# Altium PCB ESP-WROOM32.PcbDoc (part 2 of 2)
Units mil, origin at the board's own origin, x right, y up, seen from the top; angles counter-clockwise.
Board outline 3370 x 1400 mil, 2 copper layers (L1, L2); 42 components, 54 nets, 176 pads, 101 vias.
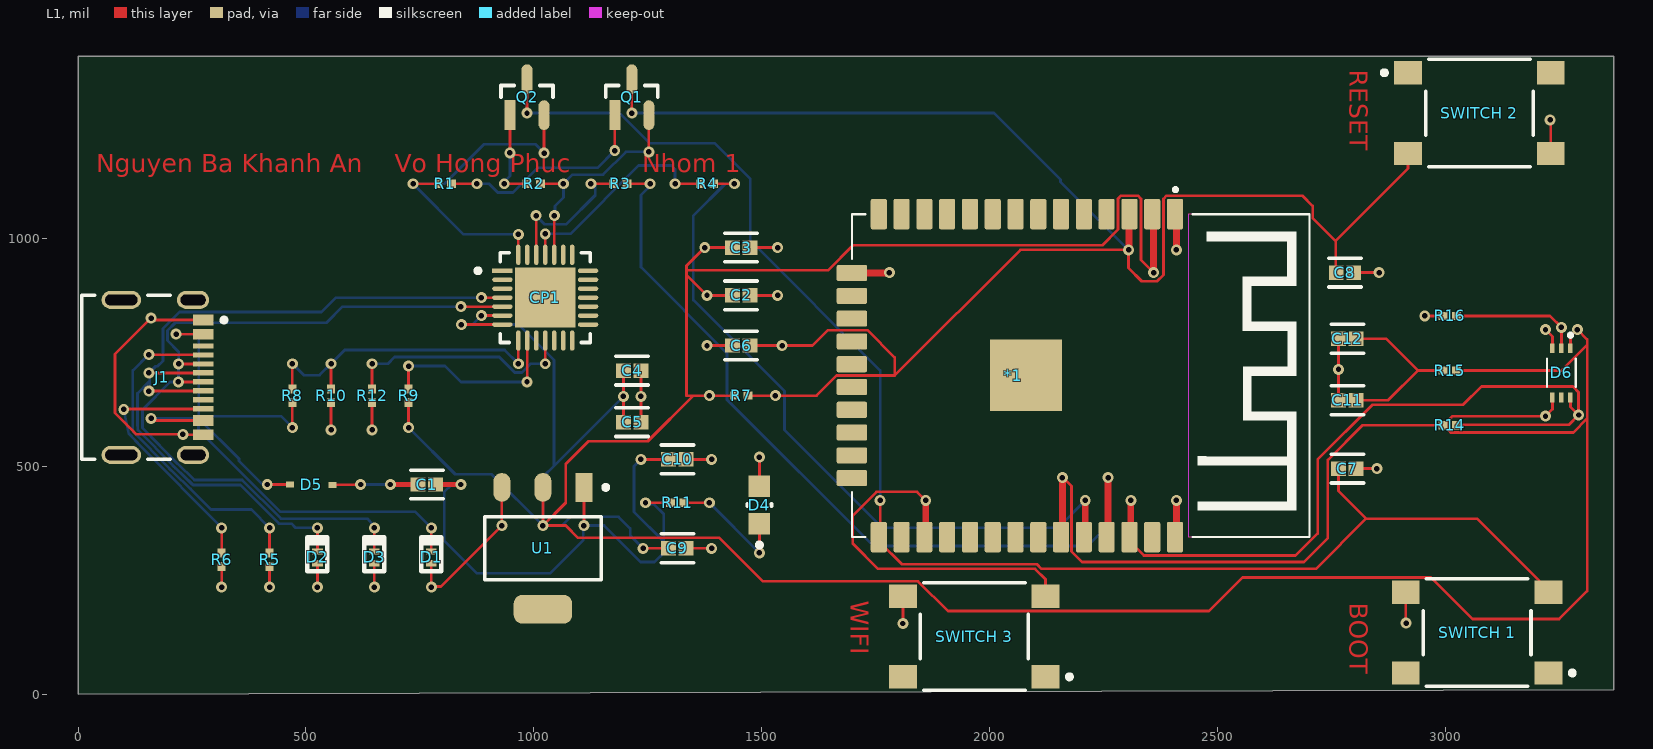
[diagram p0: L1 view]

## Part data (continued)
R10: library part RC0402FR-1347K5L, "RES 47.5K OHM 1% 1/16W 0402", Case/Package=0402, LCSC part number=C106235, Manufacturer="Yageo Group", Max Operating Temperature=155°C, Min Operating Temperature=-55°C, Power Dissipation=62.5mW, Supplier Part Number=13-RC0402FR-1347K5LCT-ND, Temperature Coefficient=100ppm/°C, Tolerance=1%, Working Voltage=50V, Category="Chip SMD Resistors", China RoHS=Non-Compliant, ComponentLink1Description=https://datasheet.octopart.com:443/RC0402FR-1347K5L-Yageo-datasheet-175887523.pdf?src-supplier=IHS, ComponentLink1URL=https://datasheet.octopart.com:443/RC0402FR-1347K5L-Yageo-datasheet-175887523.pdf?src-supplier=IHS, ComponentLink2Description=https://datasheet.octopart.com:443/RC0402FR-1347K5L-Yageo-Group-datasheet-189192902.pdf?src-supplier=TME, ComponentLink2URL=https://datasheet.octopart.com:443/RC0402FR-1347K5L-Yageo-Group-datasheet-189192902.pdf?src-supplier=TME, ComponentLink3Description=https://datasheet.octopart.com:443/RC0402FR-1347K5L-Yageo-Group-datasheet-176638170.pdf?src-supplier=TME, ComponentLink3URL=https://datasheet.octopart.com:443/RC0402FR-1347K5L-Yageo-Group-datasheet-176638170.pdf?src-supplier=TME, ComponentLink4Description=https://datasheet.octopart.com/RC0402FR-1347K5L-Yageo-datasheet-73766026.pdf, ComponentLink4URL=https://datasheet.octopart.com/RC0402FR-1347K5L-Yageo-datasheet-73766026.pdf, ComponentLink5Description=https://datasheet.octopart.com:443/RC0402FR-1347K5L-Yageo-datasheet-10408619.pdf?src-supplier=_legacy+Avnet, ComponentLink5URL=https://datasheet.octopart.com:443/RC0402FR-1347K5L-Yageo-datasheet-10408619.pdf?src-supplier=_legacy+Avnet, ComponentLink6Description=http://sigma.octopart.com:80/conflict_mineral_statement/Yageo-company-3.pdf?src-supplier=Compliance+Statements, ComponentLink6URL=http://sigma.octopart.com:80/conflict_mineral_statement/Yageo-company-3.pdf?src-supplier=Compliance+Statements, ComponentLink7Description=http://sigma.octopart.com:80/rohs_statement/Yageo-company-2.pdf?src-supplier=Compliance+Statements, ComponentLink7URL=http://sigma.octopart.com:80/rohs_statement/Yageo-company-2.pdf?src-supplier=Compliance+Statements, Composition="Thick Film", Contact Plating=Tin, Depth=500µm, Height=350µm, Length=1mm, Lifecycle Status=Production, Manufacturer Part Number=RC0402FR-1347K5L, Military Standard=Not, Mounting Technology="Surface Mount", Number of Terminals=2, Pricing="1=0.1, 10=0.02, 25=0.014, 50=0.0112, 100=0.009, 250=0.00688, 500=0.00566, 1000=0.00474, 5000=0.00328 (USD)", REACH SVHC=Yes, RoHS=Compliant, Stock=75939, Supplier=DigiKey, Width=500µm
R14: library part RC0402JR-0747KL, "RES 4.7K OHM 5% 1/16W 0402", Case Code (Imperial)=0402, LCSC part number=C105870, Manufacturer="Yageo Group", Max Operating Temperature=155°C, Max Power Dissipation=63mW, Min Operating Temperature=-55°C, Power Dissipation=62.5mW, Supplier Part Number=311-47KJRCT-ND, Temperature Coefficient=100ppm/°C, Tolerance=5%, Voltage Rating=50V, Case/Package=0402, Category="Chip SMD Resistors", China RoHS=Non-Compliant, ComponentLink1Description=https://datasheet.octopart.com:443/RC0402JR-0747KL-Yageo-datasheet-175887523.pdf?src-supplier=IHS, ComponentLink1URL=https://datasheet.octopart.com:443/RC0402JR-0747KL-Yageo-datasheet-175887523.pdf?src-supplier=IHS, ComponentLink2Description=https://datasheet.octopart.com:443/RC0402JR-0747KL-Yageo-datasheet-10408619.pdf?src-supplier=Newark, ComponentLink2URL=https://datasheet.octopart.com:443/RC0402JR-0747KL-Yageo-datasheet-10408619.pdf?src-supplier=Newark, ComponentLink3Description=https://datasheet.octopart.com:443/RC0402JR-0747KL-Yageo-datasheet-8324527.pdf?src-supplier=Newark, ComponentLink3URL=https://datasheet.octopart.com:443/RC0402JR-0747KL-Yageo-datasheet-8324527.pdf?src-supplier=Newark, ComponentLink4Description=https://datasheet.octopart.com:443/RC0402JR-0747KL-Yageo-datasheet-98239111.pdf?src-supplier=Upverter, ComponentLink4URL=https://datasheet.octopart.com:443/RC0402JR-0747KL-Yageo-datasheet-98239111.pdf?src-supplier=Upverter, ComponentLink5Description=https://datasheet.octopart.com:443/RC0402JR-0747KL-Yageo-datasheet-62067350.pdf?src-supplier=element14+APAC, ComponentLink5URL=https://datasheet.octopart.com:443/RC0402JR-0747KL-Yageo-datasheet-62067350.pdf?src-supplier=element14+APAC, ComponentLink6Description=https://datasheet.octopart.com:443/RC0402JR-0747KL-Yageo-datasheet-176638170.pdf?src-supplier=JRH+Electronics, ComponentLink6URL=https://datasheet.octopart.com:443/RC0402JR-0747KL-Yageo-datasheet-176638170.pdf?src-supplier=JRH+Electronics, ComponentLink7Description=https://datasheet.octopart.com:443/RC0402JR-0747KL-Yageo-datasheet-164759695.pdf?src-supplier=Future+Electronics, ComponentLink7URL=https://datasheet.octopart.com:443/RC0402JR-0747KL-Yageo-datasheet-164759695.pdf?src-supplier=Future+Electronics, ComponentLink8Description=https://datasheet.octopart.com:443/RC0402JR-0747KL-Yageo-datasheet-137700087.pdf?src-supplier=Future+Electronics, ComponentLink8URL=https://datasheet.octopart.com:443/RC0402JR-0747KL-Yageo-datasheet-137700087.pdf?src-supplier=Future+Electronics, ComponentLink9Description=https://datasheet.octopart.com:443/RC0402JR-0747KL-Yageo-datasheet-12531192.pdf?src-supplier=Future+Electronics, ComponentLink9URL=https://datasheet.octopart.com:443/RC0402JR-0747KL-Yageo-datasheet-12531192.pdf?src-supplier=Future+Electronics, ComponentLink10Description=https://datasheet.octopart.com:443/RC0402JR-0747KL-Yageo-datasheet-8324255.pdf?src-supplier=Future+Electronics, ComponentLink10URL=https://datasheet.octopart.com:443/RC0402JR-0747KL-Yageo-datasheet-8324255.pdf?src-supplier=Future+Electronics, ComponentLink11Description=https://datasheet.octopart.com:443/RC0402JR-0747KL-Yageo-datasheet-148775077.pdf?src-supplier=TME, ComponentLink11URL=https://datasheet.octopart.com:443/RC0402JR-0747KL-Yageo-datasheet-148775077.pdf?src-supplier=TME, ComponentLink12Description=https://datasheet.octopart.com/RC0402JR-0747KL-Yageo-datasheet-73766026.pdf, ComponentLink12URL=https://datasheet.octopart.com/RC0402JR-0747KL-Yageo-datasheet-73766026.pdf, ComponentLink13Description=https://datasheet.octopart.com:443/RC0402JR-0747KL-Yageo-datasheet-8329306.pdf?src-supplier=element14, ComponentLink13URL=https://datasheet.octopart.com:443/RC0402JR-0747KL-Yageo-datasheet-8329306.pdf?src-supplier=element14, ComponentLink14Description=http://sigma.octopart.com:80/rohs_statement/Yageo-company-2.pdf?src-supplier=Compliance+Statements, ComponentLink14URL=http://sigma.octopart.com:80/rohs_statement/Yageo-company-2.pdf?src-supplier=Compliance+Statements, ComponentLink15Description=http://sigma.octopart.com:80/conflict_mineral_statement/Yageo-company-3.pdf?src-supplier=Compliance+Statements, ComponentLink15URL=http://sigma.octopart.com:80/conflict_mineral_statement/Yageo-company-3.pdf?src-supplier=Compliance+Statements, Composition="Thick Film", Depth=500µm, Features="Moisture Resistant", Height=350µm, Lead Free="Lead Free", Length=1mm, Lifecycle Status=Production, Manufacturer Part Number=RC0402JR-0747KL, Military Standard=Not, Mounting Technology="Surface Mount", Number of Terminals=2, Number of Terminations=2, Packaging="Tape & Reel", Pins=2, Power Rating=63mW, Pricing="1=0.1, 10=0.006, 25=0.0044, 50=0.003, 100=0.0028 (USD)", REACH SVHC=Yes, RoHS=Compliant, Schedule B="8533210045, 8533210045|8533210045, 8533210045|8533210045|8533210045, 8533210045|8533210045|8533210045|8533210045", Stock=272791, Supplier=DigiKey, Termination=SMD/SMT, Voltage Rating (AC)=50V, Voltage Rating (DC)=50V, Width=500µm, Working Voltage=50V
R15 R16: library part RC0402JR-071KL, "RES 1K OHM 5% 1/16W 0402", Case Code (Imperial)=0402, LCSC part number=C105637, Manufacturer="Yageo Group", Max Operating Temperature=155°C, Max Power Dissipation=63mW, Min Operating Temperature=-55°C, Power Dissipation=62.5mW, Supplier Part Number=311-1.0KJRCT-ND, Temperature Coefficient=100ppm/°C, Tolerance=5%, Voltage Rating=50V, Case/Package=0402, Category="Chip SMD Resistors", China RoHS=Non-Compliant, ComponentLink1Description=https://datasheet.octopart.com:443/RC0402JR-071KL-Yageo-datasheet-175887523.pdf?src-supplier=Farnell, ComponentLink1URL=https://datasheet.octopart.com:443/RC0402JR-071KL-Yageo-datasheet-175887523.pdf?src-supplier=Farnell, ComponentLink2Description=https://datasheet.octopart.com:443/RC0402JR-071KL-Yageo-datasheet-8324527.pdf?src-supplier=Farnell, ComponentLink2URL=https://datasheet.octopart.com:443/RC0402JR-071KL-Yageo-datasheet-8324527.pdf?src-supplier=Farnell, ComponentLink3Description=https://datasheet.octopart.com:443/RC0402JR-071KL-Yageo-datasheet-10408619.pdf?src-supplier=Newark, ComponentLink3URL=https://datasheet.octopart.com:443/RC0402JR-071KL-Yageo-datasheet-10408619.pdf?src-supplier=Newark, ComponentLink4Description=https://datasheet.octopart.com:443/RC0402JR-071KL-Yageo-datasheet-505231.pdf?src-supplier=Newark, ComponentLink4URL=https://datasheet.octopart.com:443/RC0402JR-071KL-Yageo-datasheet-505231.pdf?src-supplier=Newark, ComponentLink5Description=https://datasheet.octopart.com:443/RC0402JR-071KL-Yageo-datasheet-79472498.pdf?src-supplier=Upverter, ComponentLink5URL=https://datasheet.octopart.com:443/RC0402JR-071KL-Yageo-datasheet-79472498.pdf?src-supplier=Upverter, ComponentLink6Description=https://datasheet.octopart.com:443/RC0402JR-071KL-Yageo-datasheet-44585784.pdf?src-supplier=Upverter, ComponentLink6URL=https://datasheet.octopart.com:443/RC0402JR-071KL-Yageo-datasheet-44585784.pdf?src-supplier=Upverter, ComponentLink7Description=https://datasheet.octopart.com:443/RC0402JR-071KL-Yageo-datasheet-62067350.pdf?src-supplier=element14+APAC, ComponentLink7URL=https://datasheet.octopart.com:443/RC0402JR-071KL-Yageo-datasheet-62067350.pdf?src-supplier=element14+APAC, ComponentLink8Description=https://datasheet.octopart.com:443/RC0402JR-071KL-Yageo-datasheet-148775077.pdf?src-supplier=JRH+Electronics, ComponentLink8URL=https://datasheet.octopart.com:443/RC0402JR-071KL-Yageo-datasheet-148775077.pdf?src-supplier=JRH+Electronics, ComponentLink9Description=https://datasheet.octopart.com:443/RC0402JR-071KL-Yageo-datasheet-12531192.pdf?src-supplier=Seeed+Studio, ComponentLink9URL=https://datasheet.octopart.com:443/RC0402JR-071KL-Yageo-datasheet-12531192.pdf?src-supplier=Seeed+Studio, ComponentLink10Description=https://datasheet.octopart.com:443/RC0402JR-071KL-Yageo-datasheet-164759695.pdf?src-supplier=Future+Electronics, ComponentLink10URL=https://datasheet.octopart.com:443/RC0402JR-071KL-Yageo-datasheet-164759695.pdf?src-supplier=Future+Electronics, ComponentLink11Description=https://datasheet.octopart.com:443/RC0402JR-071KL-Yageo-datasheet-137700087.pdf?src-supplier=Future+Electronics, ComponentLink11URL=https://datasheet.octopart.com:443/RC0402JR-071KL-Yageo-datasheet-137700087.pdf?src-supplier=Future+Electronics, ComponentLink12Description=https://datasheet.octopart.com/RC0402JR-071KL-Yageo-datasheet-73766026.pdf, ComponentLink12URL=https://datasheet.octopart.com/RC0402JR-071KL-Yageo-datasheet-73766026.pdf, ComponentLink13Description=https://datasheet.octopart.com:443/RC0402JR-071KL-Yageo-datasheet-8329306.pdf?src-supplier=element14, ComponentLink13URL=https://datasheet.octopart.com:443/RC0402JR-071KL-Yageo-datasheet-8329306.pdf?src-supplier=element14, ComponentLink14Description=http://sigma.octopart.com:80/rohs_statement/Yageo-company-2.pdf?src-supplier=Compliance+Statements, ComponentLink14URL=http://sigma.octopart.com:80/rohs_statement/Yageo-company-2.pdf?src-supplier=Compliance+Statements, ComponentLink15Description=http://sigma.octopart.com:80/conflict_mineral_statement/Yageo-company-3.pdf?src-supplier=Compliance+Statements, ComponentLink15URL=http://sigma.octopart.com:80/conflict_mineral_statement/Yageo-company-3.pdf?src-supplier=Compliance+Statements, Composition="Thick Film", Depth=500µm, Features="Moisture Resistant", Height=350µm, Lead Free="Lead Free", Length=1mm, Lifecycle Status=Production, Manufacturer Part Number=RC0402JR-071KL, Military Standard=Not, Mounting Technology="Surface Mount", Number of Terminals=2, Number of Terminations=2, Packaging="Tape & Reel", Pins=2, Power Rating=62.5mW, Pricing="1=0.1, 10=0.006, 25=0.0052, 50=0.004, 100=0.0036, 250=0.00284 (USD)", REACH SVHC=Yes, RoHS=Compliant, Schedule B="8533210045, 8533210045|8533210045, 8533210045|8533210045|8533210045, 8533210045|8533210045|8533210045|8533210045", Stock=6491283, Supplier=DigiKey, Termination=SMD/SMT, Voltage Rating (AC)=50V, Voltage Rating (DC)=50V, Width=500µm, Working Voltage=50V
"SWITCH 1" "SWITCH 2" "SWITCH 3": "SWITCH TACTILE SPST-NO 0.05A 12V", Color=Black, Contact Current Rating=50mA, Contact Resistance=100mΩ, Insulation Resistance=100GΩ, LCSC part number=C221877, Manufacturer="C&K Components", Max Operating Temperature=60°C, Max Voltage Rating (DC)=12V, Min Operating Temperature=-20°C, Operating Force=1.27N, Supplier Part Number=CKN9088CT-ND, Actuator Material="Nylon, Polyamide", Category="Tactile Switches", ComponentLink1Description=https://datasheet.octopart.com:443/PTS645SL50SMTR92LFS-C%26K-Components-datasheet-169841344.pdf?src-supplier=Newark, ComponentLink1URL=https://datasheet.octopart.com:443/PTS645SL50SMTR92LFS-C%26K-Components-datasheet-169841344.pdf?src-supplier=Newark, ComponentLink2Description=https://datasheet.octopart.com:443/PTS645SL50SMTR92LFS-C%26K-Components-datasheet-27907579.pdf?src-supplier=Newark, ComponentLink2URL=https://datasheet.octopart.com:443/PTS645SL50SMTR92LFS-C%26K-Components-datasheet-27907579.pdf?src-supplier=Newark, ComponentLink3Description=https://datasheet.octopart.com:443/PTS645SL50SMTR92LFS-C%26K-Components-datasheet-67873720.pdf?src-supplier=Master+Electronics, ComponentLink3URL=https://datasheet.octopart.com:443/PTS645SL50SMTR92LFS-C%26K-Components-datasheet-67873720.pdf?src-supplier=Master+Electronics, ComponentLink4Description=https://datasheet.octopart.com:443/PTS645SL50SMTR92LFS-C%26K-Components-datasheet-165782998.pdf?src-supplier=Farnell, ComponentLink4URL=https://datasheet.octopart.com:443/PTS645SL50SMTR92LFS-C%26K-Components-datasheet-165782998.pdf?src-supplier=Farnell, ComponentLink5Description=https://datasheet.octopart.com:443/PTS645SL50SMTR-92-LFS-C%26K-Components-datasheet-150821959.pdf?src-supplier=TME, ComponentLink5URL=https://datasheet.octopart.com:443/PTS645SL50SMTR-92-LFS-C%26K-Components-datasheet-150821959.pdf?src-supplier=TME, ComponentLink6Description=https://datasheet.octopart.com:443/PTS645SL50SMTR92LFS-C%26K-Components-datasheet-138128951.pdf?src-supplier=Future+Electronics, ComponentLink6URL=https://datasheet.octopart.com:443/PTS645SL50SMTR92LFS-C%26K-Components-datasheet-138128951.pdf?src-supplier=Future+Electronics, ComponentLink7Description=http://sigma.octopart.com:80/reach_statement/ITT-company-18.pdf?src-supplier=Compliance+Statements, ComponentLink7URL=http://sigma.octopart.com:80/reach_statement/ITT-company-18.pdf?src-supplier=Compliance+Statements, Contact Material=Bronze, Contact Plating=Silver, Current Rating=50mA, Depth=9mm, Electrical Life=100kcycles, Height=3.45mm, Illumination Type=Non-Illuminated, Lead Free="Lead Free", Length=6mm, Lifecycle Status=Production, Manufacturer Part Number=PTS645SL50SMTR92LFS, Max Current Rating=50mA, Mechanical Life=100kcycles, Mounting Technology="Surface Mount", Number of Positions=1, Orientation=Straight, Packaging="Tape and Reel", Pricing="1=0.35, 10=0.3, 25=0.2804, 100=0.251, 250=0.23256, 500=0.21948 (USD)", REACH SVHC=Yes, RoHS=Compliant, Stock=13861, Supplier=DigiKey, Switch Function=Off-Mom, Termination="Gull Wing", Throw Configuration=SPST, Voltage Rating (DC)=12V
U1: "IC REG LINEAR 3.3V 1A SOT-223", LCSC part number=C6186, Manufacturer="UMW(Youtai Semiconductor Co., Ltd.)", Supplier Part Number=4518-AMS1117-3.3CT-ND, Category="LDO Voltage Regulators", Manufacturer Part Number=AMS1117-3.3, Pricing="1=0.68, 10=0.407, 25=0.3352, 100=0.2538, 250=0.2138, 500=0.18916, 1000=0.16853 (USD)", Stock=9165, Supplier=DigiKey

## Via types
v1: diameter 24, hole 12, L1 to L2, 101 vias

## Nets (pads, with @x,y where several pads share a name; then routed paths per layer and width w, separated by ;. In a path a pad name is that pad's centre, name@x,y a point inside that pad or via, vN(x,y) a via of type N, cw(c..) or ccw(c..) an arc to the next point about the centre after c; other vN are vias at no path point)
CLK: *1.20
CMD: *1.19
EN: "SWITCH 2.3" *1.3 C6.2 C8.2 Q1.3 R7.1 | length 3801.7
  L1 w6: v1(1215,1275) Q1.3 ; R7.1 v1(1530,655) 1620.15,655 1664.43,699.28 1791.78,699.28 ; C6.2 v1(1545,765) 1611.59,765 1645.31,798.72 1732.03,798.72 1791.78,738.96 1791.78,699.28 ; C8.2 2759.52,926.22 2759.52,994.52 ; 2918.5,1186.42 2918.5,1153.5 2759.52,994.52 ; 1791.78,699.28 2067.5,975 v1(2305,975) 2305,935 2334,906 2367.87,906 2381.72,919.85 2381.72,1086.84 2388.67,1093.8 2686.2,1093.8 2709.08,1070.92 2709.08,1044.97 2759.52,994.52
  L1 w15: v1(2305,975) 2306,976 2306,1053.33 *1.3@2305,1054.33
  L2 w6: v1(1215,1275) 2010,1275 2155.78,1129.22 2155.78,1124.22 v1(2305,975)
EXT_5V: C1.2 C10.2 R11.2 U1.1 | length 1368
  L1 w6: v1(1110,370) 1110.16,370.16 U1.1 ; v1(1235,515) C10.2 ; v1(1245,420) R11.2
  L1 w10: C1.2 v1(840,460)
  L2 w6: v1(840,460) 820,460 803.25,443.25 803.25,336.75 875,265 1035,265 1108.65,338.65 1108.65,368.65 v1(1110,370) 1154.37,370 1234.37,290 1265,290 1285,310 1285,335 ; v1(1235,515) 1220,500 1220,400 1285,335 ; v1(1245,420) 1248.44,416.56 1263.31,416.56 1285,394.87 1285,335
GND: "SWITCH 1.4" "SWITCH 2.4" "SWITCH 3.4" *1.1 *1.15 *1.38 C2.1 C3.1 C4.1 C5.1 C6.1 C7.1 C8.1 C9.1 C10.1 C11.1 C12.1 D1.2 D2.2 D3.2 D4.2 D6.3 J1.A1-B12 J1.B1-A12 R5.1 R6.1 R10.1 R12.1 R16.1 U1.3 | length 2458.9
  L1 w6: J1.B1-A12 230.98,569.02 v1(230,570) 128.13,570 81,617.13 81,746 v1(160,825) 164.02,820.98 J1.A1-B12 ; v1(315,235) R6.1 ; v1(420,235) R5.1 ; v1(525,235) D2.2 ; v1(555,580) R10.1 ; v1(645,580) R12.1 ; v1(650,235) D3.2 ; D1.2 v1(775,235) 776,236 796,236 v1(930,370) 929.84,370.16 U1.3 ; C5.1 v1(1235,653.5) C4.1 ; C9.1 v1(1390,320) ; C10.1 v1(1390,515) ; v1(1380,765) C6.1 ; C2.1 v1(1535,875) ; C3.1 v1(1535,980) ; D4.2 v1(1495,520) ; v1(1810,155) 1810,215 ; C11.1 v1(2765.75,712.5) C12.1 ; C8.1 v1(2855,925) ; C7.1 v1(2850,495) ; 2913.5,223.58 2913.5,156.5 v1@2915,155 ; v1(2955,830) R16.1 ; v1(3220,800) 3235.32,784.69 D6.3 ; v1(3230,1260) 3231.5,1258.5 3231.5,1186.42
  L1 w15: *1.15@1705.94,925 1706.44,924.5 1779.5,924.5 v1(1780,925) ; *1.38@2410,350.67 v1(2410,425) ; v1(2410,975) *1.1@2410,1059.33
  other v1: 2914.25,155.75
IO0: "SWITCH 1.3" *1.25 C7.2 Q2.3 | length 3227.3
  L1 w6: v1(985,1275) Q2.3@985,1324.39 ; v1(1760,425) 1760,332.87 1807.87,285 2104.14,285 2114.14,275 2716.22,275 2826.36,385.14 ; C7.2 2765.75,445.75 2826.36,385.14 ; 3206.57,248.58 3070.02,385.14 2826.36,385.14 ; 3221.57,223.58 3226.5,223.58
  L2 w6: v1(985,1275) 1188.13,1275 1254.13,1209 1396,1209 1475,1130 1475,995 1760,710 v1(1760,425)
IO2: *1.24
IO4: *1.26
IO5: *1.29
IO12: *1.14
IO13: *1.16
IO14: *1.13
IO15: *1.23
IO16: "SWITCH 3.3" *1.27 | length 818
  L1 w6: v1(1860,425) 1841,444 1752.13,444 1700,391.87 1700,330 1755,275 2100,275 2122.99,252.01 2122.99,215
  L1 w15: *1.27@1860,350.67 v1(1860,425)
IO17: *1.28
IO18: *1.30
IO19: *1.31
IO21: *1.2 *1.33 C2.2 C3.2 C4.2 C5.2 C9.2 CP1.6 CP1.7 D6.1 D6.4 R7.2 R9.1 R14.1 R15.2 U1.2 | length 9836.2
  L1 w6: v1(725,585) R9.1 ; v1(840.94,810.94) CP1.7 ; v1(885,830.63) CP1.6 ; U1.2 v1(1020,370) ; C5.2 v1(1196.49,653.5) C4.2 ; v1(1240,320) C9.2 ; C2.2 v1(1380,875) 1335.05,919.95 ; C3.2 v1(1375,980) 1335.05,940.05 1335.05,930.05 ; R7.2 v1(1385,655) 1350,655 ; v1(2160,475) 2161.61,475 2180,456.61 2180,312.87 2202.87,290 2690,290 2742.44,342.44 2742.44,513.77 2818.68,590 R14.1 ; v1(2360,925) 2332.28,952.72 2332.28,1086.84 2325.33,1093.8 2288.67,1093.8 2282,1087.13 2282,1019.53 2247.47,985 1700.15,985 1645.2,930.05 1335.05,930.05 ; R15.2 3255,710 3311.5,766.5 ; D6.4 3235.32,625.31 v1(3220,610) 3016.16,610 3012.02,605.86 3007.92,601.76 3007.92,578.24 3012.02,574.14 3281.01,574.14 3311.5,604.63 ; D6.1 3274.68,784.69 v1(3290,800) 3311.5,778.5 3311.5,766.5 ; v1(1020,370) 1070,420 1070,505 1120,555 1250,555 1350,655 ; v1(1020,370) 1070,370 1097.13,342.87 1407.13,342.87 1502.41,247.59 1843.41,247.59 1908.59,182.41 2481.37,182.41 2555.13,256.17 2968.83,256.17 3060,165 3250,165 3311.5,226.5 3311.5,604.63 ; 1335.05,919.95 1335.05,930.05 ; 1335.05,919.95 1335.05,654.98 1350,655 ; 3311.5,604.63 3311.5,766.5
  L1 w15: *1.33@2160,350.67 v1(2160,475) ; v1(2360,925) *1.2@2360,1059.33
  L2 w6: v1(725,585) 827.5,482.5 907.5,482.5 v1(1020,370) ; v1(840.94,810.94) 865.31,810.94 ; v1(885,830.63) 865.31,810.94 ; v1(1196.49,653.5) 1044,501.01 ; v1(1240,320) 1211.28,348.72 1211.28,363.72 1186,389 1080.87,389 1061.87,370 v1(1020,370) ; 865.31,810.94 965.93,810.94 1044,732.87 1044,501.01 ; v1(1020,370) 1020,477.01 1044,501.01
IO22: *1.36 D6.6 R14.2 | length 1787.5
  L1 w6: v1(2310,425) 2310,332.87 2338.67,304.2 2671.51,304.2 2720,352.69 2720,515 2840,635 3039.33,635 3079.33,675 3280,675 3292.5,662.5 v1(3292.5,612.5) ; R14.2 3025.76,591 3271,591 v1(3292.5,612.5) ; D6.6 3274.68,630.31 v1(3292.5,612.5)
  L1 w15: *1.36@2310,350.67 v1(2310,425)
IO23: *1.37
IO25: *1.10
IO26: *1.11
IO27: *1.12
IO32: *1.8
IO33: *1.9
IO34: *1.6
IO35: *1.7
NC: *1.32
NetC1_1: C1.1 D5.2 | length 174.7
  L1 w6: D5.2@563.5,459.5 v1@619.5,459.5
  L1 w10: D5.2@563,459 D5.2@563.5,459.5 ; v1@619.5,459.5 v1(620,460) ; v1(685,460) C1.1
  L2 w6: v1(620,460) v1@676.54,460
NetC11_2: C11.2 C12.2 R15.1 | length 382.6
  L1 w6: C11.2 2875,645 2940,710 ; C12.2 2870,780 2940,710 ; R15.1 2940,710
NetCP1_4: CP1.4 D2.1 J1.A6 J1.B6 | length 1820.3
  L1 w6: v1(155,665) 155.24,665.24 274.61,665.24 J1.B6 ; v1(155,705) 155.08,704.92 274.76,704.92 J1.A6 ; D2.1 v1(525,365) ; v1(885,870) CP1.4
  L2 w6: v1(155,665) 157,667 157,703 v1(155,705) 155.76,705 170.23,719.47 174.47,719.47 186,731 186,802.01 222.38,838.39 534.07,838.39 565.68,870 v1(885,870) ; 156.5,686.5 130,660 130,597.32 130,595 131,579.86 208.25,501.25 209.99,499.51 210.32,499.18 ccw(c236.46,524.92) 210.7,498.8 213.28,496.22 250.39,460.45 252.12,458.77 254.56,458.77 356.23,458.77 441,374 468.56,374 477.56,365 v1(525,365)
NetCP1_5: CP1.5 D3.1 J1.A7 J1.B7 | length 1781.4
  L1 w6: v1(220,685) 220.16,685.16 J1.A7 ; v1(220.47,724.53) J1.B7 ; D3.1 v1(650,365) ; v1(840,850.31) CP1.5
  L2 w6: v1(220,685) 201.87,685 141,624.13 141,586.49 141,584 217.42,506.22 ccw(c236.46,524.92) 217.96,505.69 255,470 257.49,470 360,470 445,385 635,385 639.77,380.23 639.77,380.1 650,369.87 v1(650,365) ; v1@220,691.87 220.24,692.11 220.24,724.29 v1(220.47,724.53) 220.47,751.4 196,775.87 196,797.87 213.13,815 545,815 580.31,850.31 v1(840,850.31)
NetCP1_8: CP1.8 R8.2 R10.2 | length 702.9
  L1 w6: R8.2 v1(470,725) ; R10.2 v1(555,725) ; v1(965.94,725) CP1.8
  L2 w6: v1(470,725) 495,700 530,700 v1(555,725) 585,755 935.94,755 v1(965.94,725)
NetCP1_9: CP1.9 R9.2 | length 415.9
  L1 w6: R9.2 v1(725,720) ; v1(985,685) 985.31,685.31 985.31,775.57 CP1.9
  L2 w6: v1(725,720) 805,720 840,685 v1(985,685)
NetCP1_11: CP1.11 R12.2 | length 514.3
  L1 w6: R12.2 v1(645,725) ; v1(1025,725) CP1.11
  L2 w6: v1(645,725) 679.52,725 694.52,740 924.07,740 958.07,706 973.81,706 992.81,725 v1(1025,725)
NetCP1_24: CP1.24 Q1.2 R2.1 | length 511.5
  L1 w6: R2.1 v1(1065,1120) ; CP1.24 1044.84,964.27 1044.84,1049.84 v1(1045,1050) ; v1(1252.4,1190) Q1.2
  L2 w6: v1(1045,1050) 1046.35,1051.35 1046.35,1071.35 1065,1090 v1(1065,1120) 1085,1140 1151.87,1140 1201.87,1190 v1(1252.4,1190)
NetCP1_25: CP1.25 R4.2 | length 483.4
  L1 w6: CP1.25 v1(1025,1010) ; v1(1310,1120) R4.2
  L2 w6: v1(1025,1010) 1080,1010 1230,1160 1301.66,1160 1310,1151.66 v1(1310,1120)
NetCP1_26: CP1.26 R3.2 | length 325.5
  L1 w6: v1(1005,1050) 1005.16,1049.84 1005.16,964.27 CP1.26 ; v1(1125,1120) R3.2
  L2 w6: v1(1005,1050) 1024,1031 1071,1031 1134.76,1094.76 v1@1134.76,1120
NetCP1_28: CP1.28 Q2.2 R1.1 | length 766.5
  L1 w6: v1(735,1120) R1.1 ; CP1.28 v1(965.94,1009.06) ; v1(1022.4,1187.4) Q2.2@1022.4,1245.61
  L2 w6: v1(965.94,1009.06) 845.94,1009.06 v1(735,1120) 804.37,1120 890.97,1206.6 1003.2,1206.6 v1(1022.4,1187.4)
NetD4_1: D4.1 R11.1 | length 274.5
  L1 w6: R11.1 v1(1385,420) ; v1(1495,310) D4.1
  L2 w6: v1(1385,420) v1(1495,310)
NetD6_2: D6.2 R16.2 | length 286.5
  L1 w6: R16.2 3230,830 v1(3255,805) D6.2
NetJ1_A5: J1.A5 R5.2 | length 745.8
  L1 w6: v1(155,745) 155.39,744.61 274.45,744.61 J1.A5 ; R5.2 v1(420,365)
  L2 w6: v1(155,745) 120,710 120,582.32 120,580 121,575.77 121.27,575.45 198.25,497.11 200.74,494.62 203.23,492.13 ccw(c236.46,524.92) 203.64,491.71 209.1,486.26 209.14,486.22 246.29,450.45 291.8,404.95 380.05,404.95 v1(420,365)
NetJ1_B5: J1.B5 R6.2 | length 575.4
  L1 w6: v1(100,625) 100.55,625.55 274.29,625.55 J1.B5 ; R6.2 v1(315,365)
  L2 w6: v1(100,625) 110,575.86 111,572.12 111.27,571.36 137.77,543.22 315,365.99 v1(315,365)
NetQ1_1: Q1.1 R1.2 | length 481.7
  L1 w6: R1.2 v1(875,1120) ; v1(1177.6,1192.6) Q1.1
  L2 w6: v1(875,1120) 901.87,1120 920.87,1101 953.89,1101 1007.89,1155 1140,1155 v1(1177.6,1192.6)
NetQ2_1: Q2.1 R2.2 | length 181.1
  L1 w6: v1(935,1120) R2.2 ; v1(947.6,1187.6) Q2.1@947.6,1245.61
  L2 w6: v1(935,1120) 935,1124.5 947.6,1137.1 v1(947.6,1187.6)
RXD0: *1.34 R4.1 | length 1565.3
  L1 w6: R4.1 v1(1440,1120)
  L1 w15: *1.34@2210,350.67 v1(2210,425)
  L2 w6: v1(1440,1120) 1420,1120 1350,1050 1350,865 1550.17,664.83 1550.17,579.83 1765,365 2150,365 v1(2210,425)
SD0: *1.21
SD1: *1.22
SD2: *1.17
SD3: *1.18
SENSOR_VN: *1.5
SENSOR_VP: *1.4
TXD0: *1.35 R3.1 | length 1829.8
  L1 w6: R3.1 v1(1255,1120)
  L1 w15: *1.35@2260,350.67 v1(2260,475)
  L2 w6: v1@1260,1120 1235,1095 1235,936.87 1424,747.87 1424,646 1745,325 2215,325 2260,370 v1(2260,475)
VBUS: D1.1 D5.1 J1.A4-B9 J1.B4-A9 R8.1 | length 1717.1
  L1 w6: v1(160,605) 164.49,600.51 J1.B4-A9 ; v1(215,790) 215.51,789.49 J1.A4-B9 ; v1(415,460) D5.1 ; v1(470,585) R8.1 ; D1.1 v1(775,365)
  L2 w6: v1(160,605) 264.13,605 ; v1(215,790) 260.89,790 264.4,786.49 264.4,605.27 ; v1@405,460 353.14,511.86 353.14,516.54 264.4,605.27 ; v1(470,585) 445,610 269.13,610 264.4,605.27 ; v1(775,365) 740,400 444.14,400 264.13,580.01 264.13,605 ; 264.13,605 264.4,605.27
pads on no net: "SWITCH 1.1" "SWITCH 1.2" "SWITCH 2.1" "SWITCH 2.2" "SWITCH 3.1" "SWITCH 3.2" *1.1.1 CP1.1 CP1.2 CP1.3 CP1.10 CP1.12 CP1.13 CP1.14 CP1.15 CP1.16 CP1.17 CP1.18 CP1.19 CP1.20 CP1.21 CP1.22 CP1.23 CP1.27 CP1.29 D6.5 J1.1 J1.2 J1.3 J1.4 J1.A8 J1.B8 U1.4

## Polygon pours and split planes (outlines as drawn)
GND on L2 "GND_L02_P000" (solid, pour order 0): 0,0 0,1400 3370,1400 3370,5

## Other copper
L1:
  text "RESET" at 2790,1370 h40 r270
  text "Nguyen Ba Khanh An    Vo Hong Phuc         Nhom 1" at 40,1145 h40
  text "WIFI" at 1695,205 h40 r270
  text "BOOT" at 2790,200 h40 r270